# EAGLE board HV-DST (EAGLE 7.5.0)
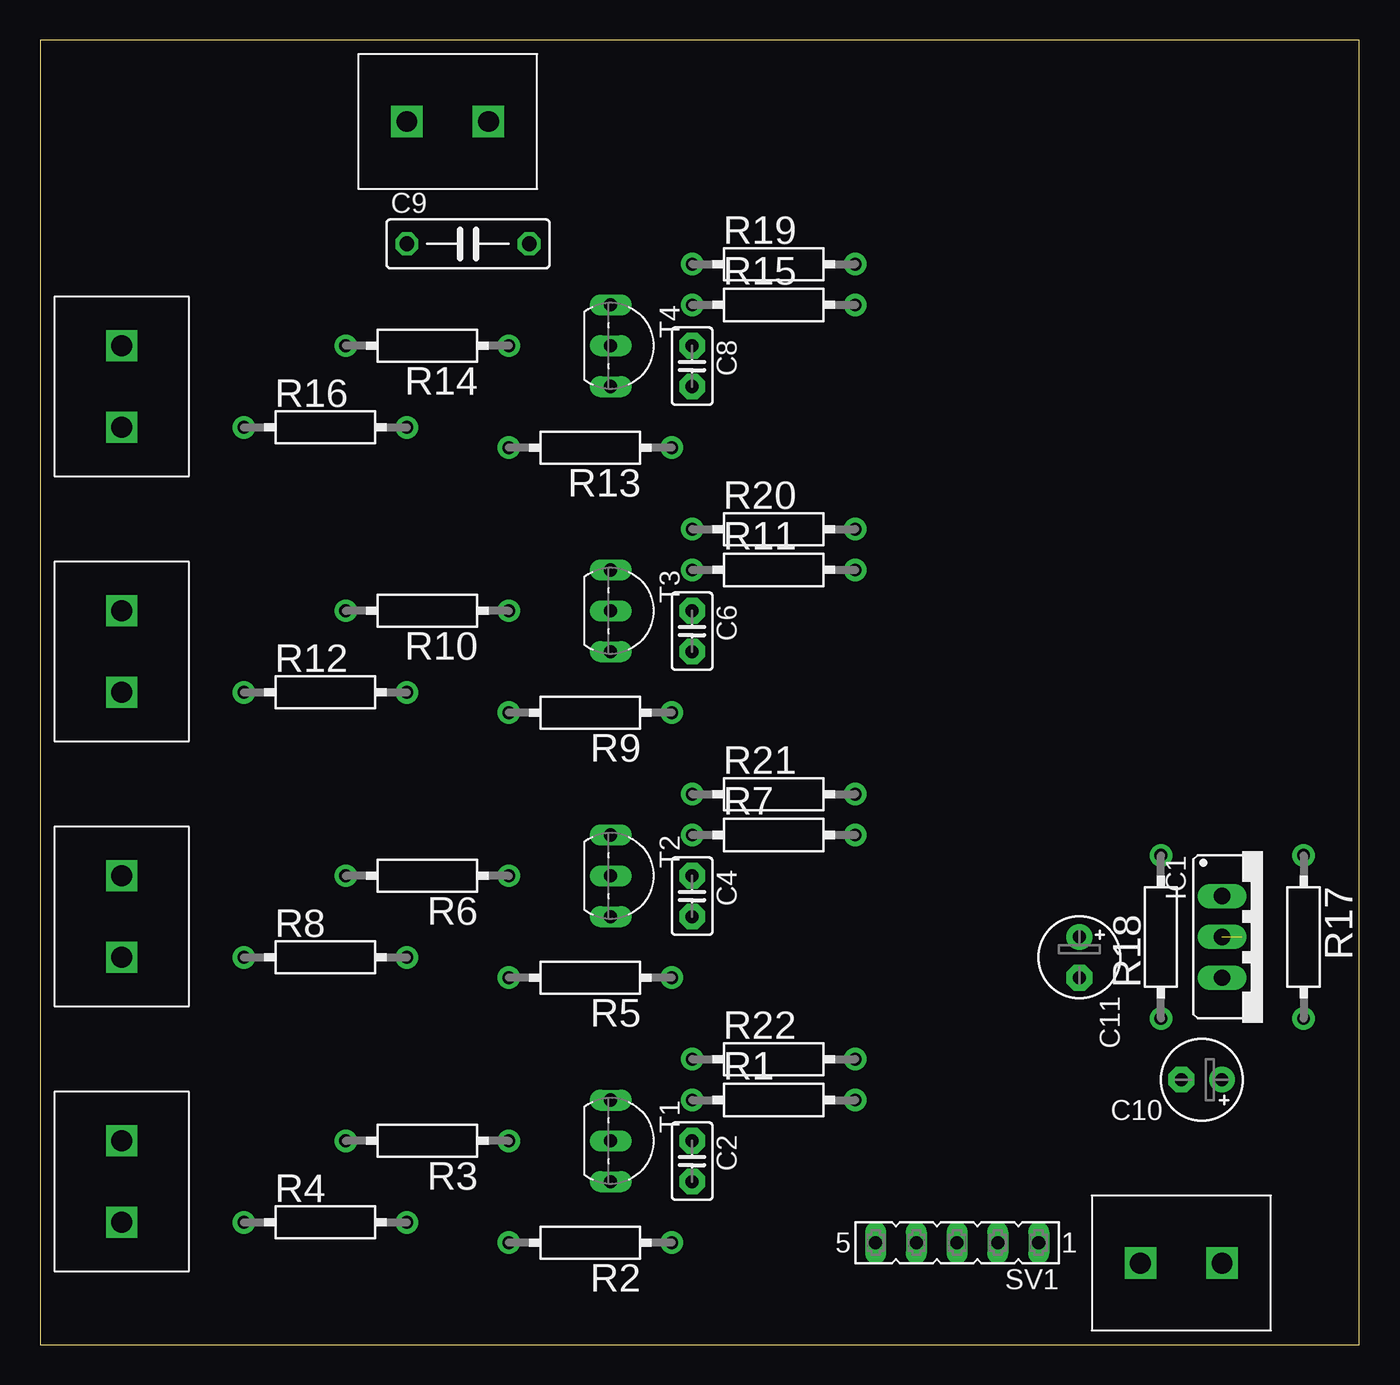
[diagram p0: board, top side]
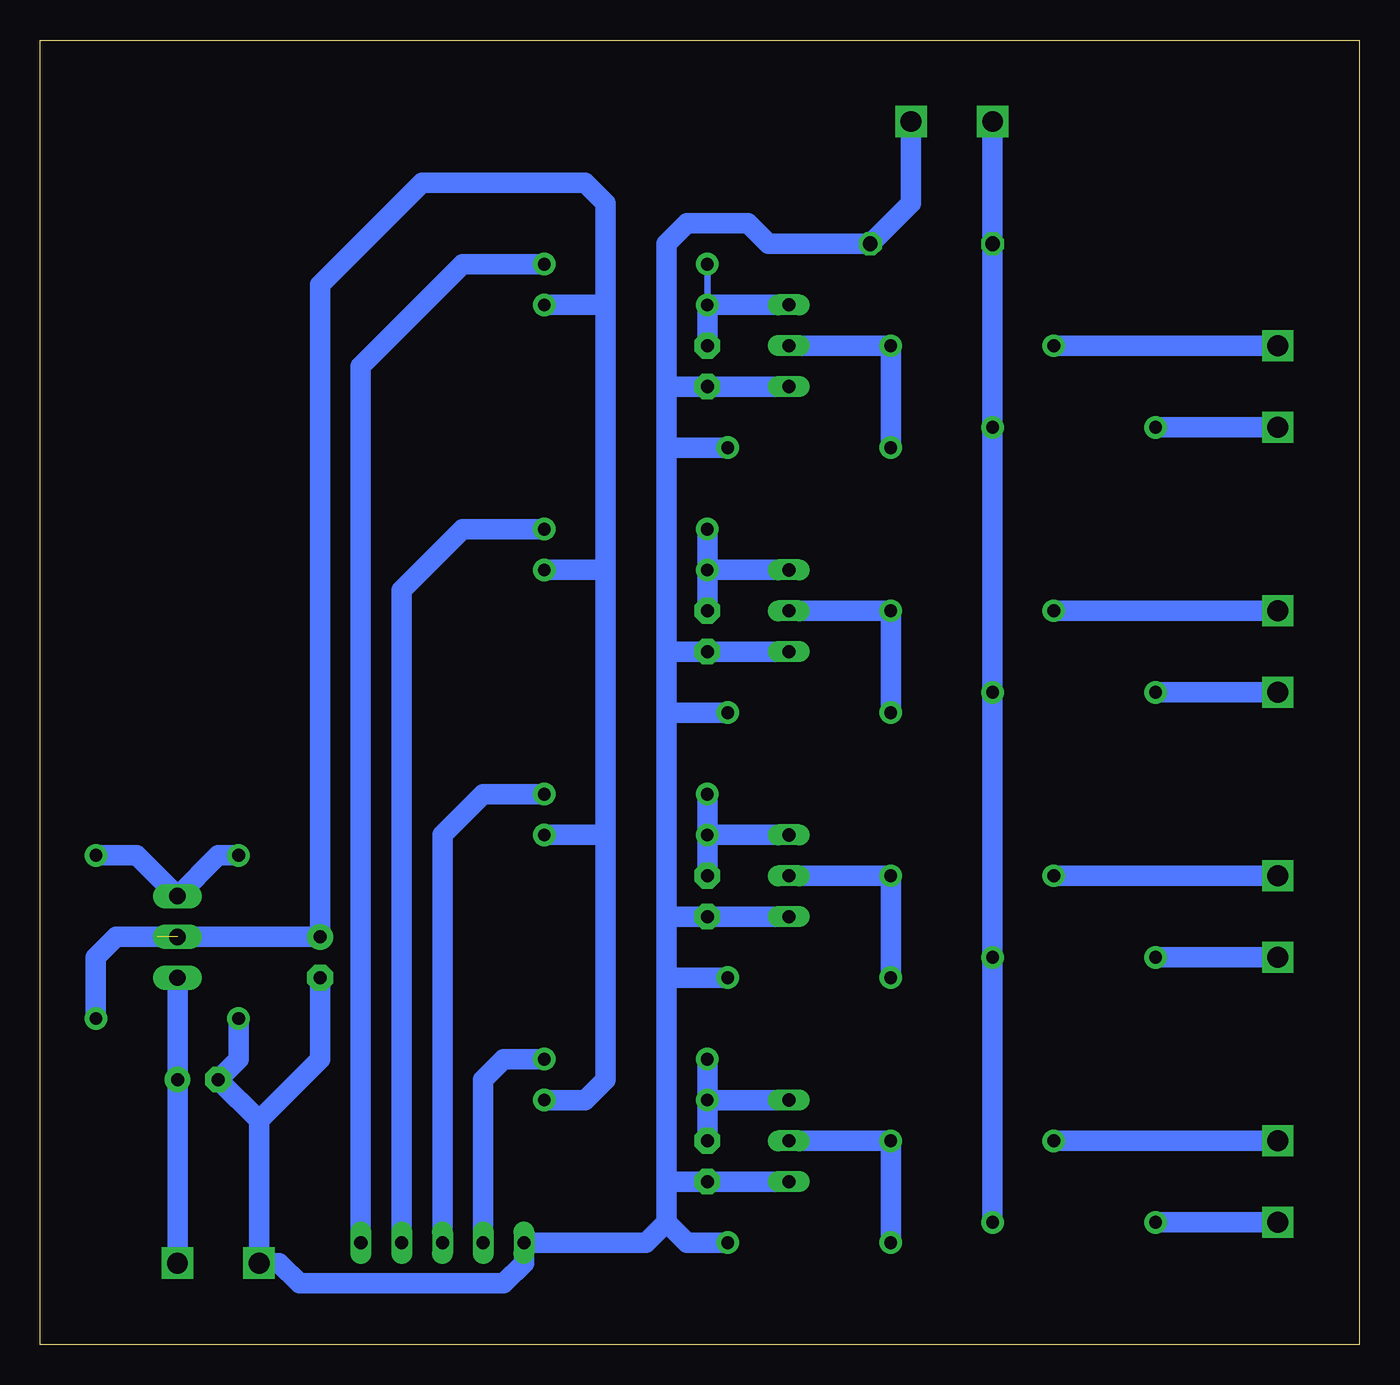
[diagram p1: board, bottom side, seen from below]

Size 82.22 x 81.27 mm. Coordinates in mm from the lower left corner, seen from the top.
Outline: 0,0 82.22,0 82.22,81.27 0,81.27 0,0
Copper layers (1*16): Top 0.035mm / dielectric 1.5mm / Bottom 0.035mm
Design rules "default": minimum track width 10mil, minimum drill 24mil, track to track 8mil, track to pad 8mil, pad to pad 8mil, via to via 8mil, smd to smd 8mil, copper to edge 40mil, drill to drill 8mil, minimum pad ring 10mil, minimum via ring 8mil, stop-mask expansion 4mil, vias tented up to drill 0mil, thermal gap 10mil

## Footprints (pad centres in the part's own frame; a part is rotated, then mirrored left to right if it is on the bottom)
C2.5-2 = drill 0.813 pad 1.6 octagon: 1 -1.27,0; 2 1.27,0
C075-032X103 = drill 0.914 octagon: 1 -3.81,0; 2 3.81,0
E2,5-5 = drill 0.813 pad 1.6: + -1.27,0 | drill 0.813 pad 1.6 octagon: - 1.27,0
317TS = drill 1.016 long: 1 -2.54,-2.54; 2 0,-2.54; 3 2.54,-2.54
RS1/4 = drill 0.8 pad 1.4: 1 -5.08,0; 2 5.08,0
FE05-1 = drill 0.813 long: 1 -5.08,0; 2 -2.54,0; 3 0,0; 4 2.54,0; 5 5.08,0
TO92-CBE = drill 0.813 long: B 0,0; C -2.54,0; E 2.54,0
ED2609 = drill 1.3 square: 1 0,0; 2 5.08,0

## Placement (x,y rotation side)
C2  330pF  [C2.5-2]  40.64,11.43 270 top
C4  330pF  [C2.5-2]  40.64,27.94 270 top
C6  330pF  [C2.5-2]  40.64,44.45 270 top
C8  330pF  [C2.5-2]  40.64,60.96 270 top
C9  0.01uF  [C075-032X103]  26.67,68.58 0 top
C10  [E2,5-5]  72.39,16.51 180 top
C11  [E2,5-5]  64.77,24.13 270 top
IC1  [317TS]  76.2,25.4 270 top
R1  [RS1/4]  45.72,15.24 0 top
R2  100k  [RS1/4]  34.29,6.35 180 top
R3  2.2k  [RS1/4]  24.13,12.7 180 top
R4  10M  [RS1/4]  17.78,7.62 0 top
R5  100k  [RS1/4]  34.29,22.86 180 top
R6  2.2k  [RS1/4]  24.13,29.21 180 top
R7  [RS1/4]  45.72,31.75 0 top
R8  10M  [RS1/4]  17.78,24.13 0 top
R9  100k  [RS1/4]  34.29,39.37 180 top
R10  2.2k  [RS1/4]  24.13,45.72 180 top
R11  [RS1/4]  45.72,48.26 0 top
R12  10M  [RS1/4]  17.78,40.64 0 top
R13  100k  [RS1/4]  34.29,55.88 180 top
R14  2.2k  [RS1/4]  24.13,62.23 180 top
R15  [RS1/4]  45.72,64.77 0 top
R16  10M  [RS1/4]  17.78,57.15 0 top
R17  100k  [RS1/4]  78.74,25.4 270 top
R18  100k  [RS1/4]  69.85,25.4 90 top
R19  100  [RS1/4]  45.72,67.31 0 top
R20  100  [RS1/4]  45.72,50.8 0 top
R21  100  [RS1/4]  45.72,34.29 0 top
R22  100  [RS1/4]  45.72,17.78 0 top
SV1  [FE05-1]  57.15,6.35 180 top
T1  [TO92-CBE]  35.56,12.7 270 top
T2  [TO92-CBE]  35.56,29.21 270 top
T3  [TO92-CBE]  35.56,45.72 270 top
T4  [TO92-CBE]  35.56,62.23 270 top
U$1  ED2609  [ED2609]  5.08,12.7 270 top
U$2  ED2609  [ED2609]  5.08,29.21 270 top
U$3  ED2609  [ED2609]  5.08,45.72 270 top
U$4  ED2609  [ED2609]  5.08,62.23 270 top
U$5  ED2609  [ED2609]  27.94,76.2 180 top
U$6  ED2609  [ED2609]  68.58,5.08 0 top

## Library data of the parts
C2 C4 C6 C8 = capacitor-wima
C9-C11 = rcl
IC1 = v-reg
R1-R22 = resistor-power; MF: OHMITE; MPN: RRS1K0; OC_FARNELL: unknown; OC_NEWARK: 01F7661
SV1 = con-lsta; OC_FARNELL: unknown; OC_NEWARK: unknown
T1-T4 = transistor
U$1-U$6 = muon-tube

## Nets
+3V3: C11.+ IC1.2 R1.2 R7.2 R11.2 R15.2 R17.2
G1: C2.1 R1.1 R22.1 T1.C
G2: C4.1 R7.1 R21.1 T2.C
G3: C6.1 R11.1 R20.1 T3.C
G4: C8.1 R15.1 R19.1 T4.C
GND: C2.2 C4.2 C6.2 C8.2 C9.2 C10.- C11.- R2.1 R5.1 R9.1 R13.1 R18.1 SV1.5 T1.E T2.E T3.E T4.E U$5.1 U$6.1
N$1: R2.2 R3.1 T1.B
N$2: R3.2 U$1.1
N$3: C10.+ IC1.3 U$6.2
N$4: R4.1 U$1.2
N$5: R5.2 R6.1 T2.B
N$6: R6.2 U$2.1
N$7: R19.2 SV1.1
N$8: R8.1 U$2.2
N$9: R9.2 R10.1 T3.B
N$10: R10.2 U$3.1
N$11: IC1.1 R17.1 R18.2
N$12: R12.1 U$3.2
N$13: R13.2 R14.1 T4.B
N$14: R14.2 U$4.1
N$15: R20.2 SV1.2
N$16: R16.1 U$4.2
N$17: R21.2 SV1.3
N$18: R22.2 SV1.4
V+: C9.1 R4.2 R8.2 R12.2 R16.2 U$5.2

## Tracks (layer width: path | path; a pad name or v marks a point on that pad's centre or on a via)
+3V3  (1 unrouted)
  Bottom 1.27: R1.2 48.26,15.24 46.99,16.51 46.99,31.75 | 46.99,31.75 46.99,48.26 | 46.99,48.26 46.99,64.77 | 46.99,64.77 R15.2 | R11.2 46.99,48.26 | R7.2 46.99,31.75 | IC1.2 C11.+ 64.77,66.04 58.42,72.39 48.26,72.39 46.99,71.12 46.99,64.77 | R17.2 78.74,24.13 77.47,25.4 74.93,25.4
G1
  Bottom 1.27: T1.C R1.1 | R1.1 C2.1 | R22.1 R1.1
G2
  Bottom 1.27: C4.1 R7.1 | T2.C R7.1 | R21.1 R7.1
G3
  Bottom 1.27: T3.C R11.1 | R11.1 C6.1 | R20.1 R11.1
G4
  Bottom 0.406: R19.1 R15.1
  Bottom 1.27: T4.C R15.1 C8.1
GND
  Bottom 1.27: T1.E C2.2 43.18,10.16 | T4.E C8.2 43.18,59.69 | T3.E C6.2 43.18,43.18 | T2.E C4.2 43.18,26.67 | 43.18,59.69 43.18,55.88 | 43.18,55.88 43.18,43.18 | 43.18,43.18 43.18,39.37 | 43.18,39.37 43.18,26.67 | 43.18,26.67 43.18,22.86 | 43.18,22.86 43.18,10.16 | 43.18,10.16 43.18,7.62 | 43.18,7.62 41.91,6.35 R2.1 | R5.1 43.18,22.86 | R9.1 43.18,39.37 | R13.1 43.18,55.88 | U$5.1 27.94,71.12 C9.2 36.83,68.58 38.1,69.85 41.91,69.85 43.18,68.58 43.18,59.69 | 43.18,7.62 44.45,6.35 SV1.5 52.07,5.08 53.34,3.81 66.04,3.81 67.31,5.08 U$6.1 68.58,13.97 | 68.58,13.97 C10.- 69.85,17.78 R18.1 | C11.- 64.77,17.78 68.58,13.97
N$1
  Bottom 1.27: T1.B R3.1 R2.2
N$2
  Bottom 1.27: U$1.1 R3.2
N$3
  Bottom 1.27: IC1.3 C10.+ U$6.2
N$4
  Bottom 1.27: R4.1 U$1.2
N$5
  Bottom 1.27: T2.B R6.1 R5.2
N$6
  Bottom 1.27: U$2.1 R6.2
N$7
  Bottom 1.27: SV1.1 62.23,60.96 55.88,67.31 R19.2
N$8
  Bottom 1.27: R8.1 U$2.2
N$9
  Bottom 1.27: T3.B R10.1 R9.2
N$10
  Bottom 1.27: U$3.1 R10.2
N$11
  Bottom 1.27: R18.2 71.12,30.48 IC1.1 76.2,30.48 R17.1
N$12
  Bottom 1.27: R12.1 U$3.2
N$13
  Bottom 1.27: T4.B R14.1 R13.2
N$14
  Bottom 1.27: U$4.1 R14.2
N$15
  Bottom 1.27: SV1.2 59.69,46.99 55.88,50.8 R20.2
N$16
  Bottom 1.27: R16.1 U$4.2
N$17
  Bottom 1.27: R21.2 54.61,34.29 57.15,31.75 SV1.3
N$18
  Bottom 1.27: R22.2 53.34,17.78 54.61,16.51 SV1.4
V+
  Bottom 1.27: R4.2 R8.2 R12.2 R16.2 C9.1 U$5.2